# EAGLE board 00A-054-A1-01 (EAGLE 9.6.2)
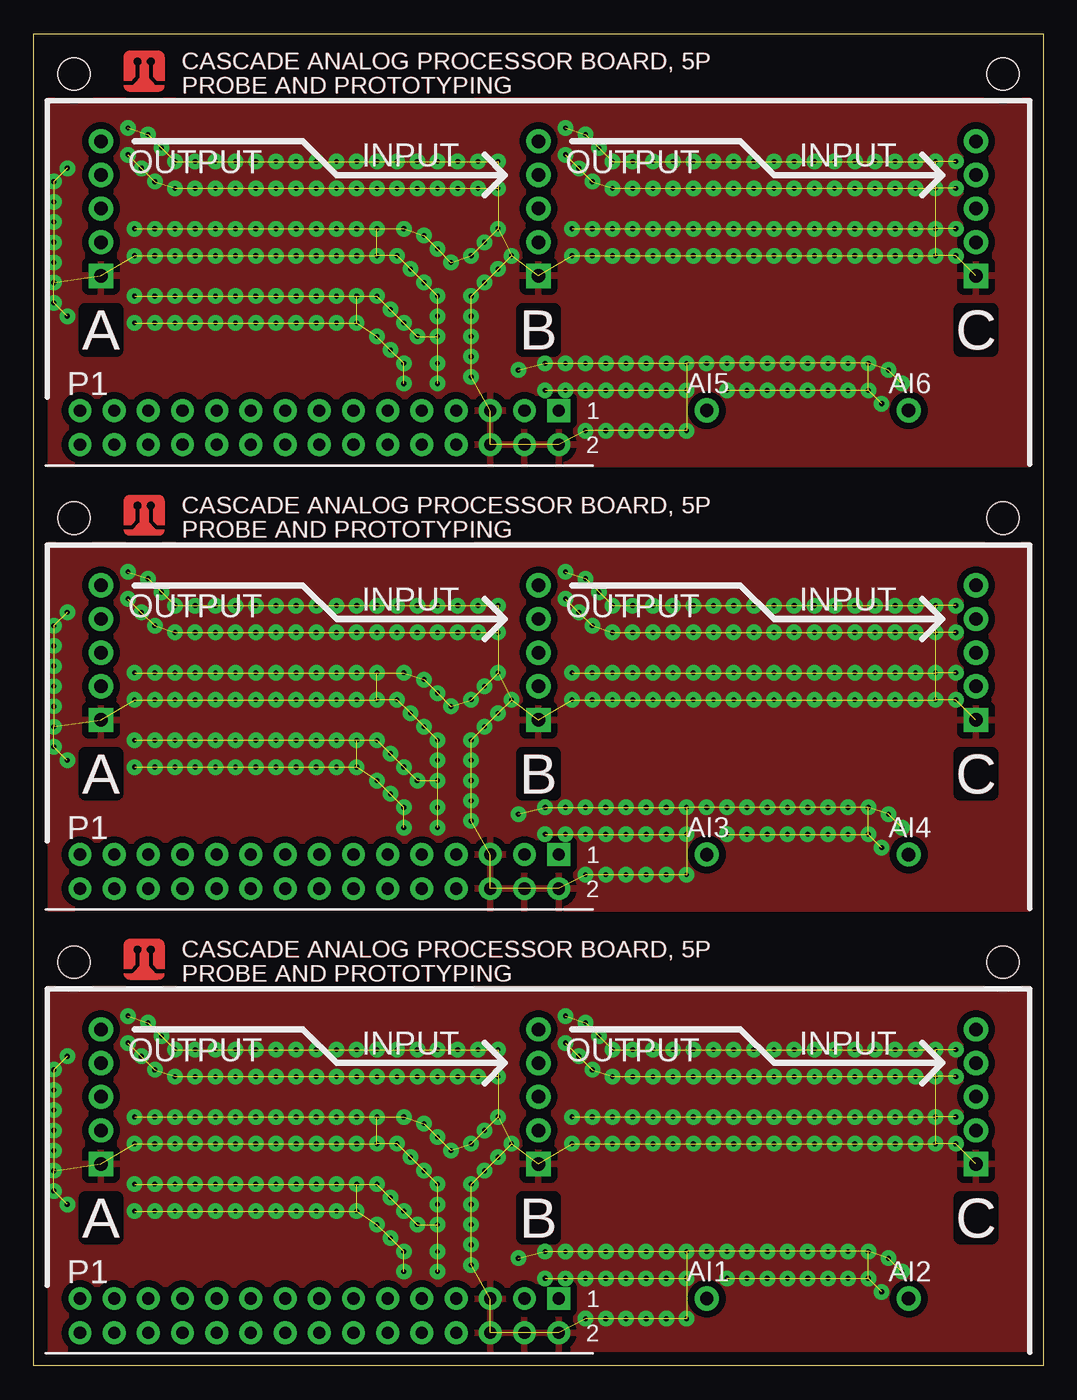
[diagram p0: board, top side]
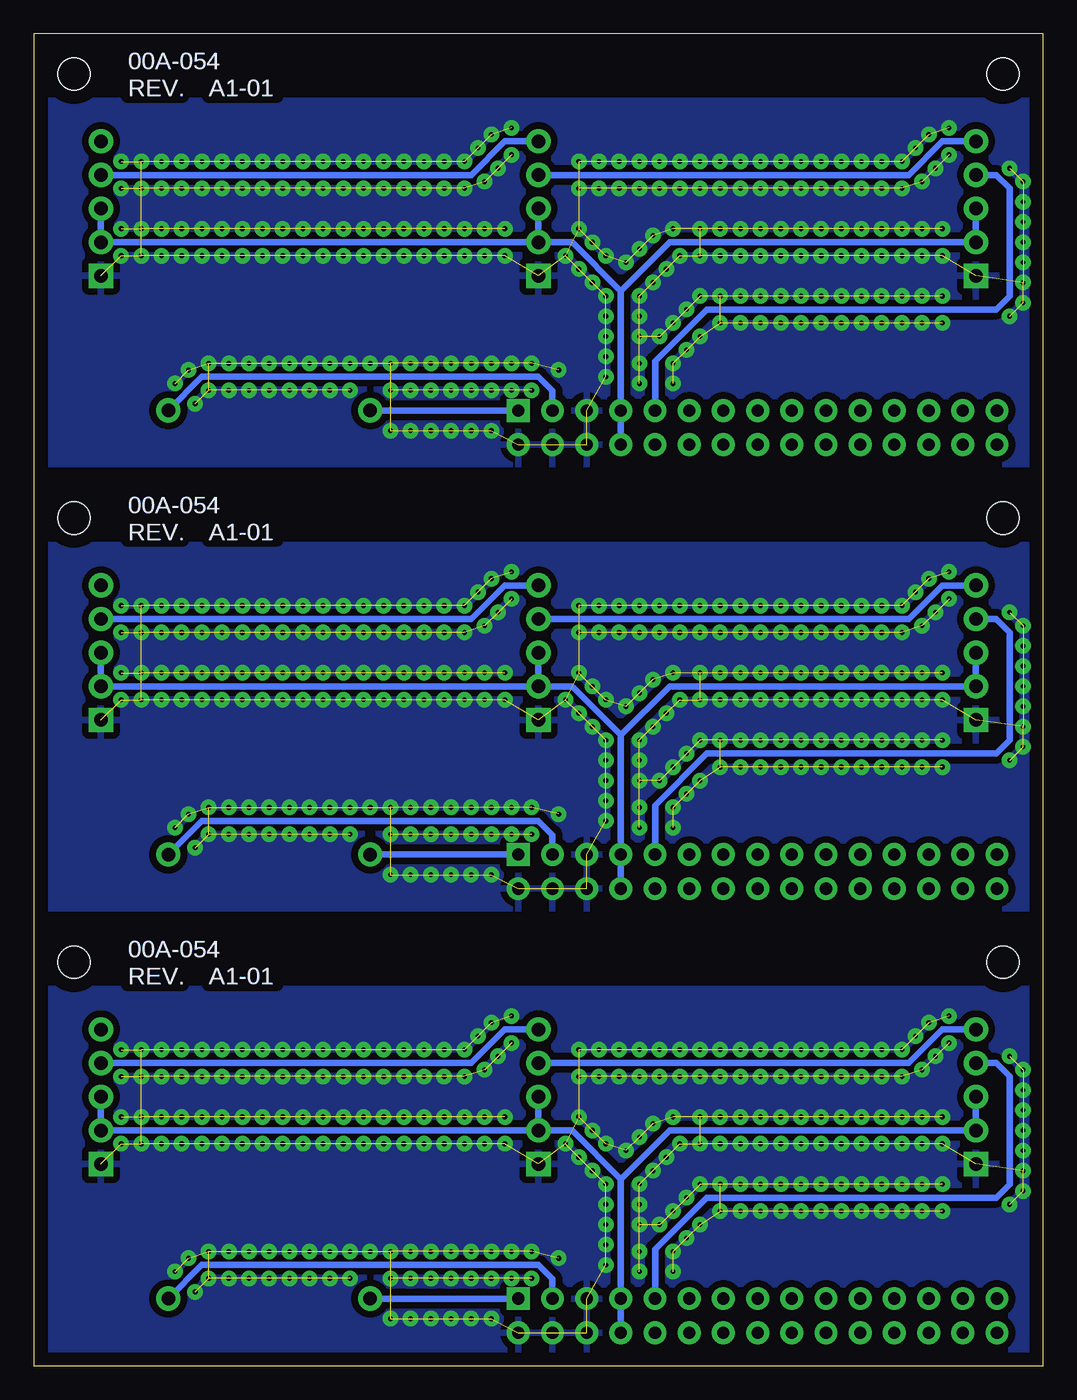
[diagram p1: board, bottom side, seen from below]

Size 75 x 99 mm. Coordinates in mm from the lower left corner, seen from the top.
Outline: 0,0 0,99 75,99 75,0 0,0
Copper layers (1*16): Top 0.035mm / dielectric 1.5mm / Bottom 0.035mm
Design rules "minipcb-THD": minimum track width 0.5mm, minimum drill 0.5mm, track to track 0.5mm, track to pad 0.5mm, pad to pad 0.5mm, via to via 0.5mm, smd to smd 0mil, copper to edge 1mm, drill to drill 1mm, minimum pad ring 0.4mm, minimum via ring 0.4mm, stop-mask expansion 0.1mm, vias tented up to drill 0.6mm, thermal gap 0.5mm

## Footprints (pad centres in the part's own frame; a part is rotated, then mirrored left to right if it is on the bottom)
PINS_1_TESTPOINT_KE5000_NOTEXT = drill 1: 1 0,0
PINS_1X5 = drill 1 square: 1 0,0 | drill 1: 2 2.5,0; 3 5,0; 4 7.5,0; 5 10,0
MINIPCB_0P_33X75 = hole 2.4: 72,30; 3,30
PINS30-2X15 = drill 0.9 square: 1 0,0 | drill 0.9: 2 0,2.54; 3 2.54,0; 4 2.54,2.54; 5 5.08,0; 6 5.08,2.54; 7 7.62,0; 8 7.62,2.54; 9 10.16,0; 10 10.16,2.54; 11 12.7,0; 12 12.7,2.54; 13 15.24,0; 14 15.24,2.54; 15 17.78,0; 16 17.78,2.54; 17 20.32,0; 18 20.32,2.54; 19 22.86,0; 20 22.86,2.54; 21 25.4,0; 22 25.4,2.54; 23 27.94,0; 24 27.94,2.54; 25 30.48,0; 26 30.48,2.54; 27 33.02,0; 28 33.02,2.54; 29 35.56,0; 30 35.56,2.54

## Placement (x,y rotation side)
AI1  [PINS_1_TESTPOINT_KE5000_NOTEXT]  50,5 0 top
AI2  [PINS_1_TESTPOINT_KE5000_NOTEXT]  65,5 0 top
AI3  [PINS_1_TESTPOINT_KE5000_NOTEXT]  50,38 0 top
AI4  [PINS_1_TESTPOINT_KE5000_NOTEXT]  65,38 0 top
AI5  [PINS_1_TESTPOINT_KE5000_NOTEXT]  50,71 0 top
AI6  [PINS_1_TESTPOINT_KE5000_NOTEXT]  65,71 0 top
E$1  [MINIPCB_PANEL_IMAGEFRAME]  -35,-30 0 top  (outside the outline)
P1  [PINS_1X5]  5,15 90 top
P2  [PINS_1X5]  37.5,15 90 top
P3  [PINS_1X5]  70,15 90 top
P4  [PINS_1X5]  5,48 90 top
P5  [PINS_1X5]  37.5,48 90 top
P6  [PINS_1X5]  70,48 90 top
P7  [PINS_1X5]  5,81 90 top
P8  [PINS_1X5]  37.5,81 90 top
P9  [PINS_1X5]  70,81 90 top
PCB1  [MINIPCB_0P_33X75]  0,0 0 top
PCB2  [MINIPCB_0P_33X75]  0,33 0 top
PCB3  [MINIPCB_0P_33X75]  0,66 0 top
U$1  ANALOGDISCOVERY  [PINS30-2X15]  39,5 180 top
U$2  ANALOGDISCOVERY  [PINS30-2X15]  39,38 180 top
U$3  ANALOGDISCOVERY  [PINS30-2X15]  39,71 180 top

## Library data of the parts
AI1-AI6 E$1 P1-P9 U$1-U$3 = minipcb
PCB1-PCB3 = minipcb; CIRCUIT_CATEGORY: PROBE AND PROTOTYPING; PART_NUMBER: 00A-054; REVISION: A1-01; TITLE: CASCADE ANALOG PROCESSOR BOARD, 5P

## Nets
GND: P1.1 P2.1 P3.1 U$1.2 U$1.4 U$1.5 U$1.6
GND1: P4.1 P5.1 P6.1 U$2.2 U$2.4 U$2.5 U$2.6
GND2: P7.1 P8.1 P9.1 U$3.2 U$3.4 U$3.5 U$3.6
N$1: AI1.1 U$1.1
N$2: AI2.1 U$1.3
N$3: P1.4 U$1.9
N$4: P1.5 P2.4
N$5: P2.5 P3.4
N$6: AI3.1 U$2.1
N$7: AI4.1 U$2.3
N$8: P4.4 U$2.9
N$9: P4.5 P5.4
N$10: P5.5 P6.4
N$11: AI5.1 U$3.1
N$12: AI6.1 U$3.3
N$13: P7.4 U$3.9
N$14: P7.5 P8.4
N$15: P8.5 P9.4
V+: P1.2 P1.3 P2.2 P2.3 P3.2 P3.3 U$1.7 U$1.8
V+1: P4.2 P4.3 P5.2 P5.3 P6.2 P6.3 U$2.7 U$2.8
V+2: P7.2 P7.3 P8.2 P8.3 P9.2 P9.3 U$3.7 U$3.8

## Tracks (layer width: path | path; a pad name or v marks a point on that pad's centre or on a via)
GND  (via drill 0.35)  (261 unrouted)
  other vias: 7.5,13.5 9,13.5 10.5,13.5 12,13.5 7.5,11.5 9,11.5 10.5,11.5 12,11.5 13.5,11.5 15,11.5 16.5,11.5 18,11.5 19.5,11.5 21,11.5 22.5,11.5 24,11.5 13.5,13.5 15,13.5 16.5,13.5 18,13.5 19.5,13.5 21,13.5 22.5,13.5 24,13.5 25.5,13.5 26.5,12.5 27.5,11.5 28.5,10.5 25.5,10.5 26.5,9.5 27.5,8.5 30,13.5 29,14.5 28,15.5 27,16.5 31,16 30,17 29,18 27.5,18.5 9,18.5 10.5,18.5 12,18.5 13.5,18.5 9,16.5 10.5,16.5 12,16.5 13.5,16.5 15,16.5 16.5,16.5 18,16.5 19.5,16.5 21,16.5 22.5,16.5 24,16.5 25.5,16.5 15,18.5 16.5,18.5 18,18.5 19.5,18.5 21,18.5 22.5,18.5 24,18.5 25.5,18.5 10.5,23.5 12,23.5 13.5,23.5 15,23.5 10.5,21.5 12,21.5 13.5,21.5 15,21.5 16.5,21.5 18,21.5 19.5,21.5 21,21.5 22.5,21.5 24,21.5 25.5,21.5 27,21.5 16.5,23.5 18,23.5 19.5,23.5 21,23.5 22.5,23.5 24,23.5 25.5,23.5 27,23.5 28.5,21.5 30,21.5 31.5,21.5 33,21.5 34.5,21.5 28.5,23.5 30,23.5 31.5,23.5 33,23.5 34.5,23.5 40,18.5 41.5,18.5 43,18.5 44.5,18.5 40,16.5 41.5,16.5 43,16.5 44.5,16.5 46,16.5 47.5,16.5 49,16.5 50.5,16.5 52,16.5 53.5,16.5 55,16.5 56.5,16.5 46,18.5 47.5,18.5 49,18.5 50.5,18.5 52,18.5 53.5,18.5 55,18.5 56.5,18.5 58,16.5 59.5,16.5 61,16.5 62.5,16.5 64,16.5 58,18.5 59.5,18.5 61,18.5 62.5,18.5 64,18.5 43,23.5 44.5,23.5 46,23.5 47.5,23.5 43,21.5 44.5,21.5 46,21.5 47.5,21.5 49,21.5 50.5,21.5 52,21.5 53.5,21.5 55,21.5 56.5,21.5 58,21.5 59.5,21.5 49,23.5 50.5,23.5 52,23.5 53.5,23.5 55,23.5 56.5,23.5 58,23.5 59.5,23.5 61,21.5 62.5,21.5 64,21.5 65.5,21.5 67,21.5 61,23.5 62.5,23.5 64,23.5 65.5,23.5 67,23.5 65.5,16.5 67,16.5 65.5,18.5 67,18.5 9.5,24.5 8.5,25.5 7,26 9,22 8,23 7,24 7.5,18.5 7.5,16.5 30,12 30,10.5 32.5,13.5 32.5,12 32.5,10.5 30,8.5 30,7 27.5,7 32.5,9 32.5,7.5 33.5,14.5 32.5,16.5 33.5,17.5 34.5,18.5 34.5,15.5 35.5,16.5 42,24.5 41,25.5 39.5,26 41.5,22 40.5,23 39.5,24 68.5,23.5 68.5,21.5 68.5,18.5 68.5,16.5 38,8.5 39.5,8.5 41,8.5 42.5,8.5 38,6.5 39.5,6.5 41,6.5 42.5,6.5 44,6.5 45.5,6.5 47,6.5 48.5,6.5 51.5,6.5 53,6.5 54.5,6.5 44,8.5 45.5,8.5 47,8.5 48.5,8.5 50,8.5 51.5,8.5 53,8.5 54.5,8.5 56,6.5 57.5,6.5 59,6.5 60.5,6.5 62,6.5 56,8.5 57.5,8.5 59,8.5 60.5,8.5 62,8.5 41,3.5 42.5,3.5 44,3.5 45.5,3.5 47,3.5 48.5,3.5 63.5,8 64.5,7 63,5.5 36,8 1.5,13 1.5,14.5 1.5,16 2.5,12 2.5,23 1.5,17.5 1.5,19 1.5,20.5 1.5,22
  pour Top: 1,1 74,1 74,28 1,28
  pour Bottom: 1,1 74,1 74,28 1,28
GND1  (via drill 0.35)  (261 unrouted)
  other vias: 7.5,46.5 9,46.5 10.5,46.5 12,46.5 7.5,44.5 9,44.5 10.5,44.5 12,44.5 13.5,44.5 15,44.5 16.5,44.5 18,44.5 19.5,44.5 21,44.5 22.5,44.5 24,44.5 13.5,46.5 15,46.5 16.5,46.5 18,46.5 19.5,46.5 21,46.5 22.5,46.5 24,46.5 25.5,46.5 26.5,45.5 27.5,44.5 28.5,43.5 25.5,43.5 26.5,42.5 27.5,41.5 30,46.5 29,47.5 28,48.5 27,49.5 31,49 30,50 29,51 27.5,51.5 9,51.5 10.5,51.5 12,51.5 13.5,51.5 9,49.5 10.5,49.5 12,49.5 13.5,49.5 15,49.5 16.5,49.5 18,49.5 19.5,49.5 21,49.5 22.5,49.5 24,49.5 25.5,49.5 15,51.5 16.5,51.5 18,51.5 19.5,51.5 21,51.5 22.5,51.5 24,51.5 25.5,51.5 10.5,56.5 12,56.5 13.5,56.5 15,56.5 10.5,54.5 12,54.5 13.5,54.5 15,54.5 16.5,54.5 18,54.5 19.5,54.5 21,54.5 22.5,54.5 24,54.5 25.5,54.5 27,54.5 16.5,56.5 18,56.5 19.5,56.5 21,56.5 22.5,56.5 24,56.5 25.5,56.5 27,56.5 28.5,54.5 30,54.5 31.5,54.5 33,54.5 34.5,54.5 28.5,56.5 30,56.5 31.5,56.5 33,56.5 34.5,56.5 40,51.5 41.5,51.5 43,51.5 44.5,51.5 40,49.5 41.5,49.5 43,49.5 44.5,49.5 46,49.5 47.5,49.5 49,49.5 50.5,49.5 52,49.5 53.5,49.5 55,49.5 56.5,49.5 46,51.5 47.5,51.5 49,51.5 50.5,51.5 52,51.5 53.5,51.5 55,51.5 56.5,51.5 58,49.5 59.5,49.5 61,49.5 62.5,49.5 64,49.5 58,51.5 59.5,51.5 61,51.5 62.5,51.5 64,51.5 43,56.5 44.5,56.5 46,56.5 47.5,56.5 43,54.5 44.5,54.5 46,54.5 47.5,54.5 49,54.5 50.5,54.5 52,54.5 53.5,54.5 55,54.5 56.5,54.5 58,54.5 59.5,54.5 49,56.5 50.5,56.5 52,56.5 53.5,56.5 55,56.5 56.5,56.5 58,56.5 59.5,56.5 61,54.5 62.5,54.5 64,54.5 65.5,54.5 67,54.5 61,56.5 62.5,56.5 64,56.5 65.5,56.5 67,56.5 65.5,49.5 67,49.5 65.5,51.5 67,51.5 9.5,57.5 8.5,58.5 7,59 9,55 8,56 7,57 7.5,51.5 7.5,49.5 30,45 30,43.5 32.5,46.5 32.5,45 32.5,43.5 30,41.5 30,40 27.5,40 32.5,42 32.5,40.5 33.5,47.5 32.5,49.5 33.5,50.5 34.5,51.5 34.5,48.5 35.5,49.5 42,57.5 41,58.5 39.5,59 41.5,55 40.5,56 39.5,57 68.5,56.5 68.5,54.5 68.5,51.5 68.5,49.5 38,41.5 39.5,41.5 41,41.5 42.5,41.5 38,39.5 39.5,39.5 41,39.5 42.5,39.5 44,39.5 45.5,39.5 47,39.5 48.5,39.5 51.5,39.5 53,39.5 54.5,39.5 44,41.5 45.5,41.5 47,41.5 48.5,41.5 50,41.5 51.5,41.5 53,41.5 54.5,41.5 56,39.5 57.5,39.5 59,39.5 60.5,39.5 62,39.5 56,41.5 57.5,41.5 59,41.5 60.5,41.5 62,41.5 41,36.5 42.5,36.5 44,36.5 45.5,36.5 47,36.5 48.5,36.5 63.5,41 64.5,40 63,38.5 36,41 1.5,46 1.5,47.5 1.5,49 2.5,45 2.5,56 1.5,50.5 1.5,52 1.5,53.5 1.5,55
  pour Top: 1,34 74,34 74,61 1,61
  pour Bottom: 1,34 74,34 74,61 1,61
GND2  (via drill 0.35)  (261 unrouted)
  other vias: 7.5,79.5 9,79.5 10.5,79.5 12,79.5 7.5,77.5 9,77.5 10.5,77.5 12,77.5 13.5,77.5 15,77.5 16.5,77.5 18,77.5 19.5,77.5 21,77.5 22.5,77.5 24,77.5 13.5,79.5 15,79.5 16.5,79.5 18,79.5 19.5,79.5 21,79.5 22.5,79.5 24,79.5 25.5,79.5 26.5,78.5 27.5,77.5 28.5,76.5 25.5,76.5 26.5,75.5 27.5,74.5 30,79.5 29,80.5 28,81.5 27,82.5 31,82 30,83 29,84 27.5,84.5 9,84.5 10.5,84.5 12,84.5 13.5,84.5 9,82.5 10.5,82.5 12,82.5 13.5,82.5 15,82.5 16.5,82.5 18,82.5 19.5,82.5 21,82.5 22.5,82.5 24,82.5 25.5,82.5 15,84.5 16.5,84.5 18,84.5 19.5,84.5 21,84.5 22.5,84.5 24,84.5 25.5,84.5 10.5,89.5 12,89.5 13.5,89.5 15,89.5 10.5,87.5 12,87.5 13.5,87.5 15,87.5 16.5,87.5 18,87.5 19.5,87.5 21,87.5 22.5,87.5 24,87.5 25.5,87.5 27,87.5 16.5,89.5 18,89.5 19.5,89.5 21,89.5 22.5,89.5 24,89.5 25.5,89.5 27,89.5 28.5,87.5 30,87.5 31.5,87.5 33,87.5 34.5,87.5 28.5,89.5 30,89.5 31.5,89.5 33,89.5 34.5,89.5 40,84.5 41.5,84.5 43,84.5 44.5,84.5 40,82.5 41.5,82.5 43,82.5 44.5,82.5 46,82.5 47.5,82.5 49,82.5 50.5,82.5 52,82.5 53.5,82.5 55,82.5 56.5,82.5 46,84.5 47.5,84.5 49,84.5 50.5,84.5 52,84.5 53.5,84.5 55,84.5 56.5,84.5 58,82.5 59.5,82.5 61,82.5 62.5,82.5 64,82.5 58,84.5 59.5,84.5 61,84.5 62.5,84.5 64,84.5 43,89.5 44.5,89.5 46,89.5 47.5,89.5 43,87.5 44.5,87.5 46,87.5 47.5,87.5 49,87.5 50.5,87.5 52,87.5 53.5,87.5 55,87.5 56.5,87.5 58,87.5 59.5,87.5 49,89.5 50.5,89.5 52,89.5 53.5,89.5 55,89.5 56.5,89.5 58,89.5 59.5,89.5 61,87.5 62.5,87.5 64,87.5 65.5,87.5 67,87.5 61,89.5 62.5,89.5 64,89.5 65.5,89.5 67,89.5 65.5,82.5 67,82.5 65.5,84.5 67,84.5 9.5,90.5 8.5,91.5 7,92 9,88 8,89 7,90 7.5,84.5 7.5,82.5 30,78 30,76.5 32.5,79.5 32.5,78 32.5,76.5 30,74.5 30,73 27.5,73 32.5,75 32.5,73.5 33.5,80.5 32.5,82.5 33.5,83.5 34.5,84.5 34.5,81.5 35.5,82.5 42,90.5 41,91.5 39.5,92 41.5,88 40.5,89 39.5,90 68.5,89.5 68.5,87.5 68.5,84.5 68.5,82.5 38,74.5 39.5,74.5 41,74.5 42.5,74.5 38,72.5 39.5,72.5 41,72.5 42.5,72.5 44,72.5 45.5,72.5 47,72.5 48.5,72.5 51.5,72.5 53,72.5 54.5,72.5 44,74.5 45.5,74.5 47,74.5 48.5,74.5 50,74.5 51.5,74.5 53,74.5 54.5,74.5 56,72.5 57.5,72.5 59,72.5 60.5,72.5 62,72.5 56,74.5 57.5,74.5 59,74.5 60.5,74.5 62,74.5 41,69.5 42.5,69.5 44,69.5 45.5,69.5 47,69.5 48.5,69.5 63.5,74 64.5,73 63,71.5 36,74 1.5,79 1.5,80.5 1.5,82 2.5,78 2.5,89 1.5,83.5 1.5,85 1.5,86.5 1.5,88
  pour Top: 1,67 74,67 74,94 1,94
  pour Bottom: 1,67 74,67 74,94 1,94
N$1
  Bottom 0.5: U$1.1 AI1.1
N$2
  Bottom 0.5: U$1.3 36.46,6.46 37.5,7.5 62.5,7.5 AI2.1
N$3
  Bottom 0.5: U$1.9 28.84,8.66 25,12.5 3.5,12.5 2.5,13.5 2.5,21.5 3.5,22.5 P1.4
N$4
  Bottom 0.5: P1.5 7.5,25 10,22.5 P2.4
N$5
  Bottom 0.5: P2.5 40,25 42.5,22.5 P3.4
N$6
  Bottom 0.5: U$2.1 AI3.1
N$7
  Bottom 0.5: U$2.3 36.46,39.46 37.5,40.5 62.5,40.5 AI4.1
N$8
  Bottom 0.5: U$2.9 28.84,41.66 25,45.5 3.5,45.5 2.5,46.5 2.5,54.5 3.5,55.5 P4.4
N$9
  Bottom 0.5: P4.5 7.5,58 10,55.5 P5.4
N$10
  Bottom 0.5: P5.5 40,58 42.5,55.5 P6.4
N$11
  Bottom 0.5: U$3.1 AI5.1
N$12
  Bottom 0.5: U$3.3 36.46,72.46 37.5,73.5 62.5,73.5 AI6.1
N$13
  Bottom 0.5: U$3.9 28.84,74.66 25,78.5 3.5,78.5 2.5,79.5 2.5,87.5 3.5,88.5 P7.4
N$14
  Bottom 0.5: P7.5 7.5,91 10,88.5 P8.4
N$15
  Bottom 0.5: P8.5 40,91 42.5,88.5 P9.4
V+
  Bottom 0.5: U$1.8 U$1.7 31.38,13.88 | 31.38,13.88 35,17.5 P2.2 | P2.2 P2.3 | 31.38,13.88 27.76,17.5 P1.2 P1.3 | P3.3 P3.2 P2.2
V+1
  Bottom 0.5: U$2.8 U$2.7 31.38,46.88 | 31.38,46.88 35,50.5 P5.2 | P5.2 P5.3 | 31.38,46.88 27.76,50.5 P4.2 P4.3 | P6.3 P6.2 P5.2
V+2
  Bottom 0.5: U$3.8 U$3.7 31.38,79.88 | 31.38,79.88 35,83.5 P8.2 | P8.2 P8.3 | 31.38,79.88 27.76,83.5 P7.2 P7.3 | P9.3 P9.2 P8.2

## Text on the board
Top: A | B | C | A | B | C | A | B | C
tPlace: OUTPUT | INPUT | OUTPUT | INPUT | A | B | C | INPUT | INPUT | OUTPUT | OUTPUT | A | B | C | OUTPUT | INPUT | OUTPUT | INPUT | A | B | C